# Altium PCB GCI_1.1.PcbDoc
Units mil, origin at the board's own origin, x right, y up, seen from the top; angles counter-clockwise.
Board outline 4928.58 x 1974.53 mil, 2 copper layers (Top Layer, Bottom Layer); 51 components, 47 nets, 193 pads, 196 vias.
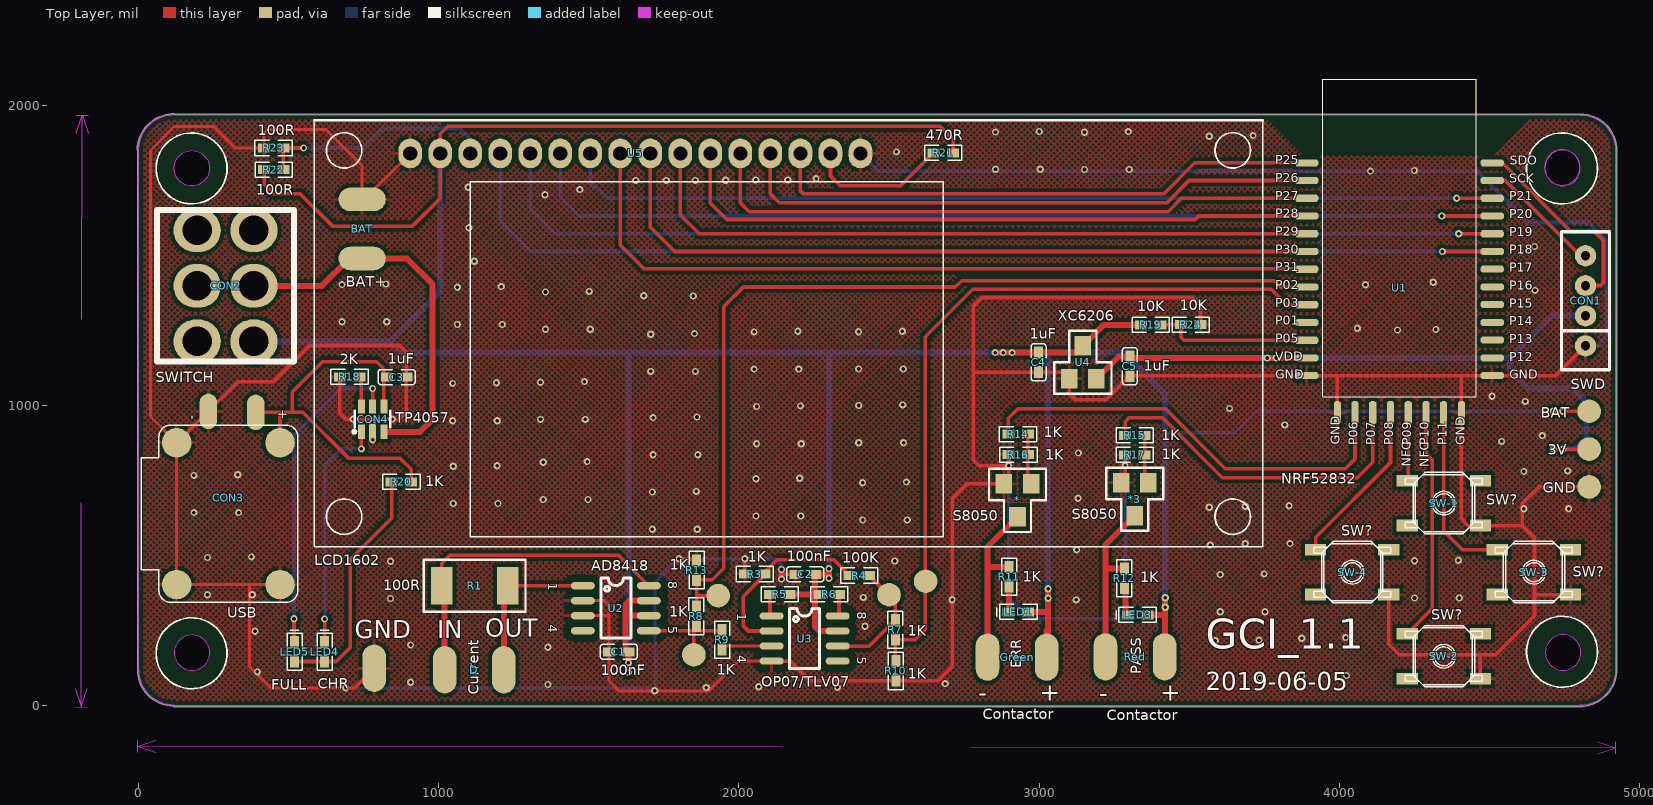
[diagram p0: Top Layer view]
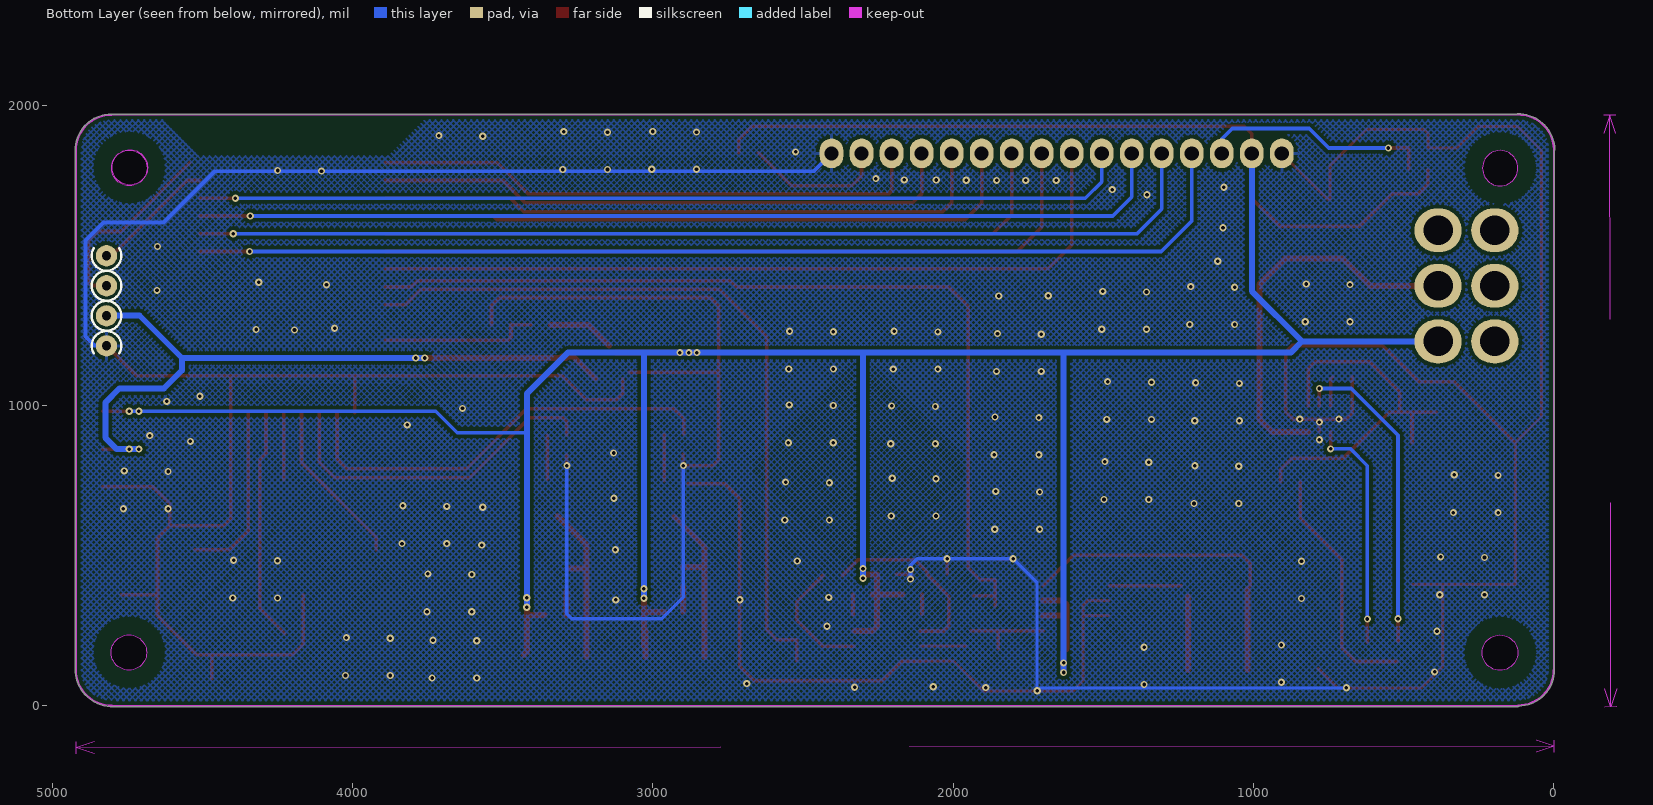
[diagram p1: Bottom Layer view, seen from below]

## Layer stack, top to bottom
Top Layer: signal copper 1.4
Dielectric: dielectric 12.6, FR-4, Dk 4.8
Bottom Layer: signal copper 1.4

## Board outline
-3.01,120 ccw(c118.11,120) 115.85,-1.1 ccw(c118.11,0) 118.11,-2.51 4795.34,-2.51 ccw(c4797,0) 4796.95,-3.01 ccw(c4798.9,122.54) 4924.47,122.54 ccw(c4798.9,122.54) 4924.47,123.21 ccw(c4921.45,123.19) 4923.77,125.12 4923.77,1848.34 ccw(c4921.26,1850) 4924.27,1850 ccw(c4803.15,1850) 4803.15,1971.13 ccw(c4803.15,1968.11) 4802.36,1971.02 121.66,1971.02 ccw(c120,1968.5) 120.08,1971.52 ccw(c116.98,1850.43) -4.11,1853.53 ccw(c-1.09,1853.45) -2.51,1850.79 -2.51,121.66 ccw(c0,120)
cut-out: 4685.04,1791.34 ccw(c4744.09,1791.34) 4744.09,1732.28 ccw(c4744.09,1791.34) 4803.15,1791.34 ccw(c4744.09,1791.34) 4744.09,1850.39 ccw(c4744.09,1791.34)
cut-out: 119.42,177.08 ccw(c178.48,177.08) 178.48,118.02 ccw(c178.48,177.08) 237.53,177.08 ccw(c178.48,177.08) 178.48,236.13 ccw(c178.48,177.08)
cut-out: 177.81,1731.84 cw(c177.81,1790.9) 118.75,1790.9 cw(c177.81,1790.9) 177.81,1849.95 cw(c177.81,1790.9) 236.86,1790.9 cw(c177.81,1790.9)
cut-out: 4683.02,1793.48 ccw(c4742.08,1793.48) 4742.08,1734.42 ccw(c4742.08,1793.48) 4801.13,1793.48 ccw(c4742.08,1793.48) 4742.08,1852.53 ccw(c4742.08,1793.48)
cut-out: 4686.39,177.4 ccw(c4745.44,177.4) 4745.44,118.35 ccw(c4745.44,177.4) 4804.5,177.4 ccw(c4745.44,177.4) 4745.44,236.46 ccw(c4745.44,177.4)

## Design rules (kind name [scope] priority, off if disabled: settings)
Clearance Clearance_1 [(InComponent('U3') OR InComponent('U2'))] p1: gap=25
Clearance [All] p2: gap=12
ComponentClearance [All] p1 off: gap=10 collisioncheckmode=3 verticalgap=10 showdistances=FALSE
MinimumSolderMaskSliver [All] p1 off: minsoldermaskwidth=10
PolygonConnect PolygonConnect_1 [isVia] p1: connectstyle=Direct reliefconductorwidth=10 reliefentries=4 polygonreliefangle="90 Angle"
PolygonConnect [All] p2: connectstyle=Relief reliefconductorwidth=10 reliefentries=4 polygonreliefangle="90 Angle"
RoutingVias [All] p1: holewidth=12 width=24 viastyle="Through Hole" minholewidth=12 minwidth=24 maxholewidth=12 maxwidth=24
SilkscreenOverComponentPads [All] p1 off: minsilkscreentomaskgap=10
SolderMaskExpansion [All] p1 off: expansion=4
Width [All] p1: maxlimit=30 minlimit=6 preferedwidth=12
25 further rules are at their usual default settings.

## Components (designator, comment, footprint, x,y, rotation, side; value= is the part's Value field where it differs from the comment)
* "S8050" SOT-23-S-1 2928,684 r180 top
*3 "S8050" SOT-23-S-1 3318,688 r180 top
BAT "BAT+" ?#1 745,1490 r90 top
C1 "100nF" 0603C 1600,180 r180 top
C2 "100nF" 0603C 2221,438 r180 top
C3 "1uF" 0603C 860,1095 r180 top
C4 "1uF" 0603C 2998,1144 r90 top
C5 "1uF" 0603C 3302,1131 r270 top
CON1 "SWD" SIP-4P 4820,1199 r90 top
CON2 "SWITCH" SW 385,1200 r180 top
CON3 "USB" USB 265,640 r0 top
CON4 "TP4057" SOT23-6-SMALL 780,955 r0 top
D "Current" ?#1 1020,120 r0 top
Green "Contactor" ?#1 3025,162 r180 top
LED1 "ERR" 0603LED 2931,313 r180 top
LED3 "PASS" 0603LED 3328,303 r180 top
LED4 "CHR" 0603LED 620,180 r90 top
LED5 "FULL" 0603LED 520,180 r90 top
R1 "100R" 2512 1120,400 r180 top
R3 "1K" 0603R 2053,439 r0 top
R4 "100K" 0603R 2401,434 r0 top
R5 "" 0603R 2136,371 r0 top
R6 "" 0603R 2301,371 r0 top
R7 "1K" 0603R 2521,253 r90 top
R8 "1K" 0603R 1858,298 r270 top
R9 "1K" 0603R 1944,220 r270 top
R10 "1K" 0603R 2523,116 r90 top
R11 "1K" 0603R 2900,430 r270 top
R12 "1K" 0603R 3284,425 r270 top
R13 "1K" 0603R 1859,452 r270 top
R14 "1K" 0603R 2930,905 r0 top
R15 "1K" 0603R 3319,901 r0 top
R16 "1K" 0603R 2931,837 r180 top
R17 "1K" 0603R 3319,836 r180 top
R18 "2K" 0603R 703,1096 r180 top
R19 "10K" 0603R 3372,1269 r180 top
R20 "1K" 0603R 876,746 r180 top
R21 "470R" 0603R 2681,1842 r180 top
R22 "100R" 0603R 451,1786 r180 top
R23 "100R" 0603R 450,1858 r0 top
R24 "10K" 0603R 3505,1270 r180 top
Red "Contactor" ?#1 3418,163 r180 top
SW-1 "SW?" KEY4X4 4348,675 r0 top
SW-2 "SW?" KEY4X4 4348,165 r0 top
SW-3 "SW?" KEY4X4 4648,445 r0 top
SW-4 "SW?" KEY4X4 4043,445 r0 top
U1 "NRF52832" ?#2 4200,1100 r0 top locked
U2 "AD8418" SOIC-8 1480,400 r0 top
U3 "OP07/TLV07" SOIC-8 2109,299 r0 top
U4 "XC6206" SOT-23-S-1 3146,1144.5 r0 top
U5 "LCD1602" LCD1602_S 2165,1240 r0 top locked

## Footprints (in the part's own frame and the unit in brackets; to place one, negate y for a bottom-side part, rotate by r counter-clockwise, add the part's x,y. Pads: shape width x height; smd on the part's side, far side on the other; paste and mask are expansions set on the pad)
0603C [mil]
  rect 40x30 smd: 1(-32.5,0) 2(32.5,0)
  silkscreen extent -62,-25 62,25
0603LED [mil]
  rect 40x30 smd: A(-32.5,0) K(32.5,0)
  silkscreen extent -62,-25 72,25
0603R [mil]
  rect 40x30 smd: 1(-32.5,0) 2(32.5,0)
  silkscreen extent -62,-25 62,25
2512 [mm]
  rect 1.8x3.2 smd: 1(-2.8,0) 2(2.8,0)
  silkscreen extent -4.3,-2.2 4.3,2.2
KEY4X4 [mm]
  rect 1.8x1 smd: 1(-3.1,1.9) 2(-3.1,-1.9) 3(3.1,1.9) 4(3.1,-1.9)
  silkscreen extent -3.25,-2.6 3.25,2.6
LCD1602_S [mm] "www.ouravr.com"
  oval 2x2.5 hole 1.2: 1(-32.004,15.24) 2(-29.464,15.24) 3(-26.924,15.24) 4(-24.384,15.24) 5(-21.844,15.24) 6(-19.304,15.24) 7(-16.764,15.24) 8(-14.224,15.24) 9(-11.684,15.24) 10(-9.144,15.24) 11(-6.604,15.24) 12(-4.064,15.24) 13(-1.524,15.24) 14(1.016,15.24) 15(3.556,15.24) 16(6.096,15.24)
  silkscreen extent -40.13,-18.03 40.13,18.03
SIP-4P [mm]
  round 1.8 hole 0.8: 1(0,0) 2(2.54,0) 3(5.08,0) 4(7.62,0)
  silkscreen extent -2.03,-2.03 9.65,2.03
SOIC-8 [mil]
  oval 80x24 smd: 1(0,0) 2(0,-50) 3(0,-100) 4(0,-150) 5(220,-150) 6(220,-100) 7(220,-50) 8(220,0)
  silkscreen extent 60,-175 160,25
SOT23-6-SMALL [mm] "SOT23, 3-Leads, Body 2.9x1.3mm, Pitch 0.95mm, Lead Span 2.4mm, IPC High Density"
  rect 0.6x1.2 smd: 1(-0.95,-1.075) 2(0,-1.075) 3(0.95,-1.075) 4(0.95,1.075) 5(0,1.075) 6(-0.95,1.075)
  silkscreen extent -1.68,-1.19 1.5,0.7, body extent -1.5,-0.7 1.5,0.7, height 1.14
SOT-23-S-1 [mil]
  rect 55x65 smd: 1(-45,-55) 2(45,-55) 3(0,55)
  silkscreen extent -95,-105 95,105
SW [mm]
  oval 4x3.7 hole 2.5: 1(0.013,-0.348) 2(0.013,-5.048) 3(0.013,-9.748) 4(4.813,-9.748) 5(4.813,-5.048) 6(4.813,-0.348)
  silkscreen extent -3.39,-11.45 8.21,1.35
USB [mm]
  oval 1.5x3 smd: 1(3.19,8.567) 2(-0.818,8.654)
  round 2.5 smd: 2(-3.503,-6) 2(-3.503,6) 2(5.247,-6) 2(5.247,6)
  silkscreen extent -6.5,-7.5 6.75,7.5
?#1 [mm]
  oval 2x4 smd: 1(0,0) 2(5,0)
?#2 [mm]
  oct 2x0.6 smd: 0(-7.85,18) 1(-7.85,16.499) 2(-7.85,14.998) 3(-7.85,13.497) 4(-7.85,11.996) 5(-7.85,10.495) 6(-7.85,8.994) 7(-7.85,7.493) 8(-7.85,5.992) 9(-7.85,4.492) 10(-7.85,2.991) 11(-7.85,1.49) 12(-7.85,-0.011) 21(7.85,0) 22(7.85,1.5) 23(7.85,3) 24(7.85,4.5) 25(7.85,6) 26(7.85,7.5) 27(7.85,9) 28(7.85,10.5) 29(7.85,12) 30(7.85,13.5) 31(7.85,15) 32(7.85,16.5) 33(7.85,18)
  oct 0.6x2 smd: 13(-5.25,-3.16) 14(-3.75,-3.16) 15(-2.25,-3.16) 16(-0.75,-3.16) 17(0.75,-3.16) 18(2.25,-3.16) 19(3.75,-3.16) 20(5.25,-3.16)
  silkscreen extent -6.5,-1.81 6.5,25.09

## Part data
BAT D: library part Contactor
C1 C2 C3 C4 C5: library part Cap
CON1: library part Contactor_1
CON2: library part CON6
LED1 LED3 LED4 LED5: library part LED
R1 R3 R4 R5 R6 R7 R8 R9 R10 R11 R12 R13 R14 R15 R16 R17 R18 R19 R20 R21 R22 R23 R24: library part Resistance
SW-1 SW-2 SW-3 SW-4: library part SW-4
U3: library part OP07

## Free pads (board coordinates)
  oval 78.74x157.48 smd: 0(785,125)
  round 78.74 smd: 0(1850,170) 0(1931,367) 0(2500,370) 0(2622,415) 0(4832,729) 0(4832,855) 0(4832,981)

## Via types
v1: diameter 24, hole 12, Top Layer to Bottom Layer, tented both sides, 196 vias

## Nets (pads, with @x,y where several pads share a name; then routed paths per layer and width w, separated by ;. In a path a pad name is that pad's centre, name@x,y a point inside that pad or via, vN(x,y) a via of type N, cw(c..) or ccw(c..) an arc to the next point about the centre after c; other vN are vias at no path point)
3V: C5.1 CON1.2 pad.0@4832,855 U1.11 U4.2 | length 2567
  Top Layer w12: v1(4712,855) pad.0@4832,855
  Top Layer w20: U4.2 3265,1163.5 C5.1 ; C5.1@3290,1158.65 U1.11
  Bottom Layer w20: v1(3760,1158.65) 4568.65,1158.65 ; v1(4712,855) 4786,855 4824,893 4824,1010 4777,1057 4629,1057 4568.65,1117.35 4568.65,1158.65 ; CON1.2@4820,1300 4710,1300 4568.65,1158.65
  other v1: 4744,855 3790,1158.65
5V: C3.2 CON3.1 CON3.2@471.58,876.22 CON4.4 R20.1 | length 1286.6
  Top Layer w12: CON3.1 547.7,977.3 701,824 872,824 908.5,787.5 R20.1 ; CON3.2@471.58,876.22 471.58,974.88 ; 512,977.3 512,1045 613,1146 794,1146 817.4,1122.6 CON4.4
ADOUT: pad.0@1931,367 R8.1 R13.2 U1.7 | length 3136.2
  Top Layer w12: R8.1@1859,331.5 R13.2 1911.5,419.5 1950,458 1950,570 ; 1859,367 pad.0@1931,367 ; 1950,582 1950,570 ; U1.7 3804.98,1395.02 3784,1416 2742.06,1416 2721.07,1395.02 2015.02,1395.02 1950,1330 1950,570
ADOUTH: pad.0@1850,170 R8.2 R9.1 U2.5 | length 301.5
  Top Layer w12: U2.5 1830,250 R9.1@1941.5,250 ; pad.0@1850,190 R8.2@1850,250
BAT: BAT.1 CON2.2 CON4.3 | length 1298.1
  Top Layer w20: CON2.2 610.74,1398.74 702,1490 894,1490 980,1404 980,955 937.68,912.68 CON4.3
CHR: CON4.1 LED4.K | length 790.2
  Top Layer w12: LED4.K v1(620,289) ; v1(742.6,855.6) CON4.1
  Bottom Layer w12: v1(620,289) 620,800 675.6,855.6 v1(742.6,855.6)
D0: U1.31 U5.7 | length 3121.6
  Top Layer w12: v1(4390.55,1690.55) U1.31
  Bottom Layer w12: U5.7 1505,1745 1559.45,1690.55 v1(4390.55,1690.55)
D1: U1.6 U5.8 | length 2624.5
  Top Layer w12: U5.8 1605,1535 1684,1456 3889.05,1456 U1.6
D2: U1.5 U5.9 | length 2464.8
  Top Layer w12: U5.9 1705,1595 1786.8,1513.2 U1.5
D3: U1.4 U5.10 | length 2316.9
  Top Layer w12: U5.10 1805,1635 1867.71,1572.29 U1.4
D4: U1.3 U5.11 | length 2178.4
  Top Layer w12: U5.11 1905,1675 1960,1620 3520,1620 3531.38,1631.38 U1.3
D5: U1.2 U5.12 | length 2081.4
  Top Layer w12: U5.12 2005,1675 2034,1646 3429.94,1646 3474.42,1690.48 U1.2
D6: U1.1 U5.13 | length 1963.4
  Top Layer w12: U5.13 2105,1705 2134,1676 3426,1676 3499.57,1749.57 U1.1
D7: U1.0 U5.14 | length 1858
  Top Layer w12: U5.14 2205,1715 2215,1705 3415,1705 3518.66,1808.66 U1.0
E: U1.30 U5.6 | length 3275.4
  Top Layer w12: v1(4341.5,1631.5) U1.30
  Bottom Layer w12: U5.6 1405,1695 1468.5,1631.5 v1(4341.5,1631.5)
G_LED: R14.1 U1.14 | length 1470.3
  Top Layer w12: R14.1 2897.5,957.5 2930,990 3420,990 3620,790 4020,790 4052.36,822.36 U1.14
GND: *3.2 *.2 BAT.2 C1.2 C2.2 C3.1 C4.1 C5.2 CON1.1 CON3.2@127.09,403.78 CON3.2@127.09,876.22 CON3.2@232.8,980.7 CON3.2@471.58,403.78 CON4.2 pad.0@785,125 pad.0@4832,729 R3.1 R10.1 R13.1 R16.2 R17.2 R18.2 R23.1 R24.1 SW-1.4 SW-2.4 SW-3.4 SW-4.4 U1.12 U1.13 U1.20 U1.21 U2.2 U2.3 U3.4 U4.1 U5.1 U5.16 | length 20293.4
  Top Layer w10: CON3.2@471.58,403.78 370,403.78 ; BAT.2 745,1799 625,1919 430,1919 417.5,1906.5 R23.1 322,1858 250,1930 120,1930 40,1850 40,963.31 127.09,876.22 127.09,403.78 370,403.78 ; BAT.2@751.85,1686.85 U5.1 ; pad.0@785,125 720,60 440,60 370,130 370,403.78 ; U2.3 1564.5,300 ; U2.2 1552,350 1567.5,334.5 C1.2 1567.5,82.5 1600,50 1900,50 1999,149 U3.4
  Top Layer w12: CON3.2@128.32,876.22 232.8,980.7 332.1,1080 450,1080 570,1200 870,1200 892.5,1177.5 C3.1 892.5,979.5 868,955 690,955 670.5,974.5 R18.2 ; CON4.2 v1@780,955 ; v1(1800,490) R13.1@1853.5,490 ; R3.1@2020,439.5 v1(2020,490) ; U3.4 2171,149 2236.5,83.5 R10.1 2663.5,83.5 2710,130 2710,690 2759,739 *.2 ; 2142,438 C2.2 ; 2781.5,1111.5 C4.1 U4.1@3079,1111.5 ; *.2@2898.5,754.5 R16.2 ; v1(2898.5,800) 2800,800 2780,820 2780,1330 2810,1360 3510,1360 3537.5,1332.5 R24.1 ; U4.1 3101,1039 3120,1020 3223.5,1020 C5.2 ; *3.2@3286.5,756.5 R17.2 ; C5.2@3302,1099.56 U1.12 ; U1.12@3891.39,1100 U1.21 4720,1100 CON1.1@4820,1200 ; U1.13 3993.31,1096.69 ; SW-4.4 4165.05,204.95 4200,170 4520,170 4650,300 4650,560 4609.8,600.2 ; 4406.69,1093.31 U1.20 4406.69,623.31 4429.8,600.2 SW-1.4 4609.8,600.2 ; SW-2.4 4470.05,169.95 ; 4650.2,370.2 SW-3.4 ; pad.0@4832,729 4665,729 4609.8,673.8 4609.8,600.2
  Top Layer w20: v1(2142,422) 2142,438 v1(2142,454)
  Bottom Layer w10: v1(690,60) 1710,60 ; v1(1720,50) 1720,410 v1(1800,490)
  Bottom Layer w12: v1(1800,490) 2120,490 2142,468 v1(2142,422) ; U5.16 2465,1780 4460,1780 4630,1610 4830,1610 4890,1550 4890,1230 4860,1200 CON1.1@4820,1200 ; v1(2898.5,800) 2898.5,361.5 2970,290 3270,290 3286.5,306.5 v1(3286.5,800)
  other v1: 1891.21,60.69 2328,62 2066.37,63.72 1363.73,70.79 2687,74 906.51,78.6 3586.5,92.5 3735.5,92.5 3875,101 4024,101 395.99,112.8 1363.73,194.79 906.51,202.6 3586.5,216.5 3732.5,218.5 3875,225 4021,227 388.13,248.09 2420,265 3603.26,313.32 3752.26,313.32 2710,353 3123.8,352.62 839.53,357.41 4250.46,359.09 4399.46,359.09 2414,361 230.01,370.04 379.01,370.04 3603.26,437.32 3749.26,439.32 839.53,481.41 2518.99,482.26 4250.46,483.09 4396.46,485.09 230.01,494.04 376.01,496.04 3124.95,519.53 3569.79,535.39 3686.76,540.16 3835.76,540.16 1712,588 1861,588 2412,619 2561,619 2056.91,632.14 2205.91,632.14 184.46,643.48 333.46,643.48 4614.72,656.36 4763.72,656.36 3566.79,661.39 3686.76,664.16 3832.76,666.16 1048.43,673.69 1197.43,673.69 1348.36,687.32 1497.36,687.32 3130,691 1712,712 1858,714 2412,743 2558,745 2056.91,756.14 2202.91,758.14 184.46,767.48 330.46,769.48 4614.72,780.36 4760.72,782.36 1048.43,797.69 1194.43,799.69 1348.36,811.32 1494.36,813.32 1714.34,836.11 1863.34,836.11 3130.79,842.15 2059,873 2208,873 2399.46,876.38 2548.46,876.38 4540.59,880.72 780,886 4676,900 3818.27,935.65 780,945 1046.34,949.74 1195.34,949.74 1339.23,953.84 1488.23,953.84 715,955 845,955 1714.34,960.11 1860.34,962.11 3634.2,990.57 2059,997 2205,999 2399.46,1000.38 2545.46,1002.38 4619,1014 4509,1031 1046.34,1073.74 1192.34,1075.74 1339.23,1077.84 1485.23,1079.84 1706.26,1113.73 1855.26,1113.73 2050.56,1121.45 2199.56,1121.45 2398.7,1121.9 2547.7,1121.9 1706.26,1237.73 1852.26,1239.73 2050.56,1245.45 2398.7,1245.9 2196.56,1247.45 2544.7,1247.9 4193.9,1251.89 4321.65,1253.46 1355.61,1254.24 1504.61,1254.24 4060.17,1257.55 1062.48,1270.18 1211.48,1270.18 678,1279 827,1279 1847.98,1365.01 1683.13,1366.09 1355.61,1378.24 1501.61,1380.24 4651.94,1383.74 1062.48,1394.18 1208.48,1396.18 4087.04,1402.42 678,1403 824,1405 4313,1410.59 1118.13,1481.09 4649.94,1529.74 1101.13,1592.09 1354.02,1702.61 1469.86,1719.45 1097.87,1727.41 1656.13,1750.09 1757.71,1749.92 1855.13,1750.09 1956.38,1750.6 2056.34,1751.56 2162.49,1751.72 2257.13,1756.09 4103.99,1781.16 4249.99,1783.16 2854.64,1786.94 3003.64,1786.94 3151.21,1786.52 3300.21,1786.52 2524.72,1844.87 3566.82,1897.36 3712.82,1899.36 2854.64,1910.94 3151.21,1910.52 3000.64,1912.94 3297.21,1912.52
Net*3_1: *3.1 R15.2 R17.1 | length 146.5
  Top Layer w12: *3.1@3351.5,754.5 R15.2
Net*3_3: *3.3 R12.1 Red.2 | length 570.5
  Top Layer w20: Red.2 3221.15,536.15 *3.3 ; 3223.65,457.5 R12.1
Net*_1: *.1 R14.2 R16.1 | length 155.5
  Top Layer w12: *.1@2962.5,749.5 R14.2
Net*_3: *.3 Green.2 R11.1 | length 575.7
  Top Layer w20: Green.2 2828.15,529.15 *.3 ; 2832.65,462.5 R11.1
NetCON4_6: CON4.6 R18.1 | length 101.6
  Top Layer w12: R18.1 742.6,1088.9 CON4.6
NetD_1: D.1 R1.2 U2.8 | length 1086.9
  Top Layer w12: R1.2 1009.76,473.76 1037,501 1599,501 U2.8
  Top Layer w20: D.1 R1.2@1020,389.76
NetD_2: D.2 R1.1 U2.1 | length 482.9
  Top Layer w12: R1.1@1241,400 U2.1
  Top Layer w20: D.2 R1.1@1216.85,363.85
NetLED1_K: LED1.K R11.2 | length 83
  Top Layer w20: LED1.K@2900,314.5 R11.2
NetLED3_K: LED3.K R12.2 | length 78
  Top Layer w20: LED3.K@3287,302 R12.2@3287,380
NetLED4_A: LED4.A LED5.A R20.2 | length 813.6
  Top Layer w12: LED5.A 658.5,147.5 705,194 705,487 843.5,625.5 R20.2
NetR3_2: R3.2 R4.1 U3.2 | length 631.3
  Top Layer w12: U3.2 2032,249 2015,266 2015,365 2085.5,435.5 2085.5,444.5 2128,487 2315.5,487 R4.1
NetR4_2: pad.0@2500,370 R4.2 R7.2 U3.6 | length 412.6
  Top Layer w12: U3.6 2434.5,199 R7.2 2521,346.5 R4.2
NetR5_1: R5.1 U3.1 | length 66.5
  Top Layer w12: U3.1@2103.5,304.5 R5.1
NetR6_2: R6.2 U3.8 | length 67.5
  Top Layer w12: U3.8@2333.5,303.5 R6.2
NetR9_2: R9.2 U3.3 | length 153.5
  Top Layer w10: R9.2@1955.5,199 U3.3
NetR21_2: R21.2 U5.15 | length 477.7
  Top Layer w12: U5.15 2305,1765 2338,1732 2538.5,1732 R21.2
NetR22_1: R22.1 R23.2 U5.3 | length 782.9
  Top Layer w12: R22.1@482.5,1787 R23.2 v1(550,1858)
  Bottom Layer w12: v1(550,1858) 749,1858 814,1923 1070,1923 1105,1888 U5.3
OPOUT: pad.0@2622,415 R7.1 R10.2 U1.8 | length 2515.4
  Top Layer w12: R10.2@2521,150.5 R7.1 2587.5,220.5 2621,254 2621,1229 2779,1387 3773,1387 3824.08,1335.92 U1.8
POW: R19.1 R24.2 U1.10 | length 532
  Top Layer w12: R19.1 R24.2@3471.5,1269 ; R24.2 3472.5,1227.5 3482.26,1217.74 U1.10
R/W: U1.29 U5.5 | length 3423.3
  Top Layer w12: v1(4397.56,1572.44) U1.29
  Bottom Layer w12: U5.5 1305,1655 1387.56,1572.44 v1(4397.56,1572.44)
R_LED: R15.1 U1.15 | length 1144.3
  Top Layer w12: R15.1 3286.5,946.5 3300,960 3410,960 3610,760 4060,760 4111.42,811.42 U1.15
RS: U1.28 U5.4 | length 3571.1
  Top Layer w12: v1(4343.39,1513.39) U1.28
  Bottom Layer w12: U5.4 1205,1615 1306.61,1513.39 v1(4343.39,1513.39)
SCK: CON1.4 U1.32 | length 414.3
  Top Layer w12: U1.32 4552.39,1749.61 4802,1500 CON1.4@4820,1500
SDO: CON1.3 U1.33 | length 648.8
  Top Layer w12: U1.33@4542.45,1808.66 4771.11,1580 4850,1580 4880,1550 4880,1410 4870,1400 CON1.3@4820,1400
STD: CON4.5 LED5.K | length 1072.8
  Top Layer w12: LED5.K@518,214.5 v1(518,290) ; CON4.5 v1(780,1057)
  Bottom Layer w12: v1(518,290) 518,901 674,1057 v1(780,1057)
SW1: SW-3.1 U1.19 | length 597.5
  Top Layer w12: U1.19 4347.64,582.36 4410.2,519.8 SW-3.1
SW2: SW-2.1 U1.18 | length 779.5
  Top Layer w12: SW-2.1 4310,323.85 4310,820 4288.58,841.42 U1.18
SW3: SW-1.1 U1.17 | length 222.2
  Top Layer w12: SW-1.1@4229.53,753.38 U1.17
SW4: SW-4.1 U1.16 | length 559.1
  Top Layer w12: SW-4.1 3920.95,560.95 4170.47,810.47 U1.16
VCC: C1.1 C2.1 C4.2 CON2.1 Green.1 LED1.A LED3.A pad.0@4832,981 R5.2 R6.1 R19.2 R21.1 R22.2 Red.1 U2.6 U2.7 U3.7 U4.3 U5.2 | length 13240.4
  Top Layer w12: R22.2 418.5,1736.5 450,1705 539,1705 646,1598 913,1598 1005,1690 U5.2 1005,1905 1030,1930 2670,1930 2713.5,1886.5 R21.1 ; v1(4712,981) pad.0@4832,981
  Top Layer w20: v1(1632,111) C1.1@1632,180 ; C1.1 1622,190.5 1622,336 1636,350 U2.7 ; 1632.5,300 U2.6 ; R5.2 R6.1 ; v1(2300,425) v1(2300,457) ; 2300,438 C2.1 2253.5,263.5 2268,249 U3.7 ; v1(2853.5,1176.5) C4.2 U4.3@3123,1176.5 ; LED1.A 3023,313 ; Green.1 3025,251.5 ; Green.1@3030,200 v1(3030,390) ; U4.3 3215.5,1269 R19.2 ; LED3.A 3417,303 ; v1(3420,360) 3420,180 Red.1@3430,170
  Bottom Layer w12: 3420,910 3652,910 3723,981 v1(4744,981)
  Bottom Layer w20: CON2.1 837.7,1213.7 ; U5.2 1005,1381 837.7,1213.7 ; v1(1632,111) 1632,1168.5 ; v1(2300,425) 2300,1176.5 ; v1(3030,358) 3030,1176.5 ; v1(3420,328) 3420,1040 3283.5,1176.5 874.9,1176.5 837.7,1213.7
  other v1: 1632,143 2880,1176.5 2910,1176.5
pads on no net: CON2.3 CON2.4 CON2.5 CON2.6 SW-1.2 SW-1.3 SW-2.2 SW-2.3 SW-3.2 SW-3.3 SW-4.2 SW-4.3 U1.9 U1.22 U1.23 U1.24 U1.25 U1.26 U1.27 U2.4 U3.5

## Polygon pours and split planes (outlines as drawn)
GND on Top Layer "Top Layer-No Net" (hatched 45Degree grid 14 track 6, remove dead copper, pour order 12): -28.09,2045.35 4886.91,2045.35 5001.91,1930.35 4976.91,1905.35 4976.91,-34.65 -43.09,-34.65
GND on Bottom Layer "Top Layer-No Net" (hatched 45Degree grid 14 track 6, remove dead copper, pour order 12): -62.22,2040.43 4852.78,2040.43 4967.78,1925.43 4942.78,1900.43 4942.78,-39.57 -77.22,-39.57

## Keep-outs
Keep-Out Layer:
  lines w1: -211,-3.97 -171,-4.03 ; -210.91,56.03 -191,-4 ; -208.09,1907.03 -188,1967 ; -208,1967.03 -168,1966.97 ; -189.96,676.13 -191,-4 ; -189.04,1286.87 -188,1967 ; -170.91,55.97 -191,-4 ; -168.09,1906.97 -188,1967 ; -3.02,-155 -2.98,-115 ; 56.98,-155.05 -3,-135 ; 57.02,-115.05 -3,-135 ; 2143.71,-136.74 -3,-135 ; 2773.29,-137.26 4920,-139 ; 4859.98,-158.95 4920,-139 ; 4860.02,-118.95 4920,-139 ; 4919.98,-159 4920.02,-119
  lines w5: 0,120 0,1853.45 ; 118.11,0 4801.32,0 ; 120,1968.5 4803.15,1968.5 ; 4921.26,120 4921.26,1850
  lines w6: -1.09,1853.45 cw(c116.98,1850.43) 120,1968.5 ; 0,120 ccw(c118.11,120) 118.11,1.89 ; 4801.32,1.28 ccw(c4803.15,119.37) 4921.26,120 ; 4803.15,1968.11 cw(c4803.15,1850) 4921.26,1850
  text "1971.002 (mil)" at -143.25,686.06 h60 r89.91
  text "4923.002 (mil)" at 2153.67,-183.46 h60 r359.95

## Other copper
Top Layer:
  pour cut-out: 3699,2169 3699,2012 3880,1831 4514,1831 4690,2007 4690,2159 4675,2174
Bottom Layer:
  pour cut-out: 3699,2169 3699,2012 3880,1831 4514,1831 4690,2007 4690,2159 4675,2174

## Silkscreen, mask and mechanical layers (free items; w line width, h text height)
Top Overlay:
  circle w6: c176.89,1790 r118.11
  circle w6: c176.89,175 r118.11
  circle w6: c4741.89,1790 r118.11
  circle w6: c4741.89,180 r118.11
  lines w5: 1105.2,563.9 2680,563.9 2680,1745 1105.2,1745 1105.2,563.9
  text "BAT" at 4671,959 h35
  text "3V" at 4695,836 h35
  text "GND" at 4677,709 h35
  text "OUT" at 1155,230 h60
  text "GND" at 720,225 h60
  text "IN" at 995,225 h60
  text "GCI_1.1" at 3554.41,189.69 h100
  text "2019-06-05" at 3554.41,51.89 h60
  text "+" at 3002,17 h60
  text "+" at 3404,16 h60
  text "-" at 2798,15 h60
  text "-" at 3200,14 h60
Mechanical 1:
  circle w6: c177.17,1791.34 r59.06
  circle w6: c177.17,177.17 r59.06
  circle w6: c4744.09,177.17 r59.06
  circle w6: c4744.09,1791.34 r59.06
  circle w6: c4744.09,177.17 r59.06
  lines w5: 0,120 0,1853.45 ; 118.11,0 4797,0 ; 120,1968.5 4803.15,1968.5 ; 4921.26,122.56 4921.26,1850
  lines w6: -1.09,1853.45 cw(c116.98,1850.43) 120,1968.5 ; 0,120 ccw(c118.11,120) 118.11,1.89 ; 4797,0 ccw(c4798.9,122.54) 4921.45,123.19 ; 4803.15,1968.11 cw(c4803.15,1850) 4921.26,1850
  text "OUTLINE: Mechanical1" at 1720.41,-560.11 h60

## Text inside footprints (layer, text, board x,y; h text height)
CON3: Top Overlay "+" at 493.2,952.2 h30 r90; Top Overlay "-" at 190.3,953 h30 r90
U1: Top Overlay "NFC" at 4297.5,795.3 h30 r90; Top Overlay "NFC" at 4237.3,796.5 h30 r90; Top Overlay "P25" at 3787.3,1803.5 h30; Top Overlay "P29" at 3786.5,1565.7 h30; Top Overlay "P28" at 3786.5,1625.15 h30; Top Overlay "P26" at 3786.5,1744.05 h30; Top Overlay "P27" at 3786.5,1684.6 h30; Top Overlay "P03" at 3786.5,1327.9 h30; Top Overlay "P02" at 3786.5,1387.35 h30; Top Overlay "P30" at 3786.5,1506.25 h30; Top Overlay "P31" at 3786.5,1446.8 h30; Top Overlay "P05" at 3786.5,1209 h30; Top Overlay "P01" at 3786.5,1268.45 h30; Top Overlay "VDD" at 3786.5,1149.55 h30; Top Overlay "GND" at 3786.5,1090.1 h30; Top Overlay "GND" at 4566.5,1088.8 h30; Top Overlay "P12" at 4566.5,1148.25 h30; Top Overlay "P14" at 4566.5,1267.15 h30; Top Overlay "P13" at 4566.5,1207.7 h30; Top Overlay "P17" at 4566.5,1445.5 h30; Top Overlay "P18" at 4566.5,1504.95 h30; Top Overlay "P16" at 4566.5,1386.05 h30; Top Overlay "P15" at 4566.5,1326.6 h30; Top Overlay "P21" at 4566.5,1683.3 h30; Top Overlay "SCK" at 4566.5,1742.75 h30; Top Overlay "P20" at 4566.5,1623.85 h30; Top Overlay "P19" at 4566.5,1564.4 h30; Top Overlay "SDO" at 4567.3,1802.2 h30; Top Overlay "P11" at 4358,868.5 h30 r90; Top Overlay "P10" at 4298.55,868.5 h30 r90; Top Overlay "GND" at 4417.45,868.5 h30 r90; Top Overlay "P07" at 4120.2,868.5 h30 r90; Top Overlay "P06" at 4060.75,868.5 h30 r90; Top Overlay "P08" at 4179.65,868.5 h30 r90; Top Overlay "P09" at 4239.1,868.5 h30 r90; Top Overlay "GND" at 4001.3,869.3 h30 r90
U2: Top Overlay "8" at 1765,415 h30 r270; Top Overlay "5" at 1765,265 h30 r270; Top Overlay "4" at 1365,270 h30 r270; Top Overlay "1" at 1365,410 h30 r270
U3: Top Overlay "8" at 2394,314 h30 r270; Top Overlay "5" at 2394,164 h30 r270; Top Overlay "4" at 1994,169 h30 r270; Top Overlay "1" at 1994,309 h30 r270